# Altium PCB MAG-PCB.PcbDoc
Units mil, origin at the board's own origin, x right, y up, seen from the top; angles counter-clockwise.
Board outline 688.98 x 826.77 mil, 2 copper layers (Top Layer, Bottom Layer), stack 61.756 mil thick; 15 components, 8 nets, 51 pads, 64 vias.
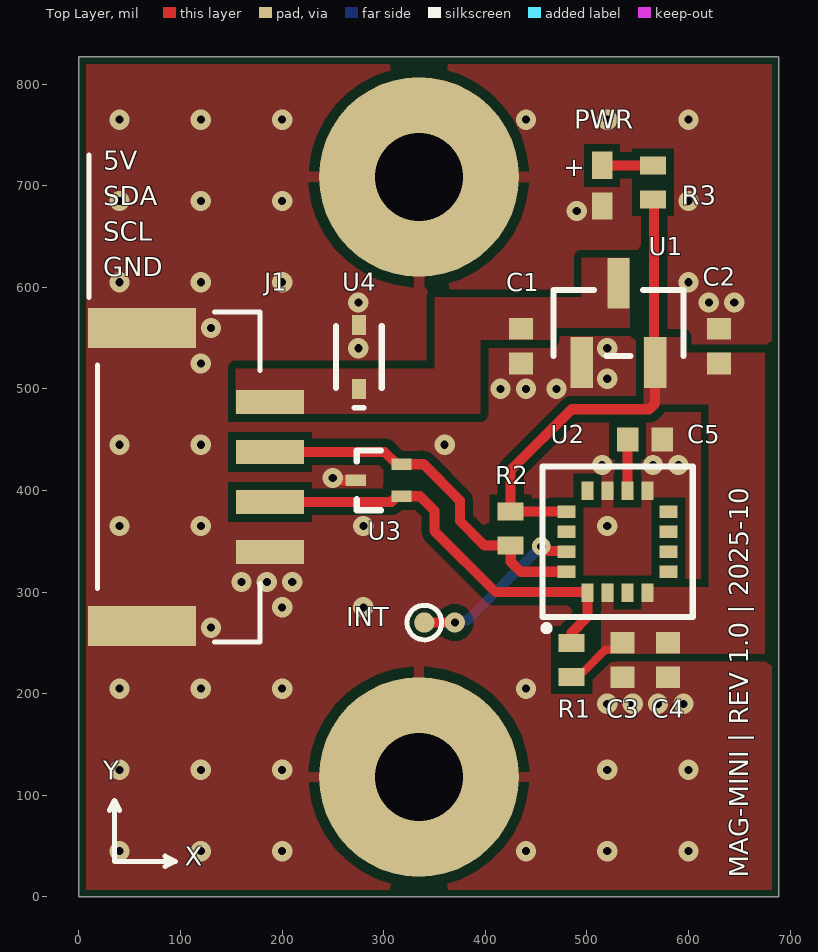
[diagram p0: Top Layer view]
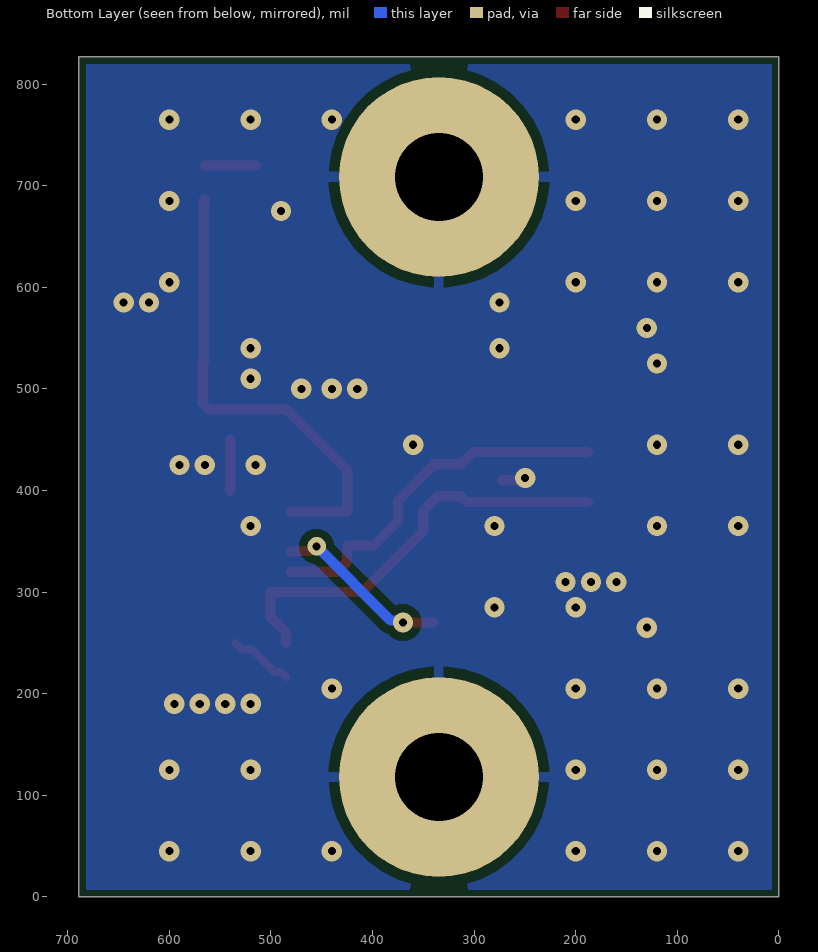
[diagram p1: Bottom Layer view, seen from below]

## Layer stack, top to bottom
Top Solder: solder mask 1, SM-001, Dk 4
Top Layer: signal copper 1.378
Dielectric 1: core 59, Core-043, Dk 4.3
Bottom Layer: signal copper 1.378
Bottom Solder: solder mask 1, SM-001, Dk 4

## Board outline
0,-0.04 0,826.73 688.98,826.73 688.98,-0.04

## Design rules (kind name [scope] priority, off if disabled: settings)
BoardOutlineClearance [All] p1: gap=7 ignorepadtopadclearanceinfootprint=FALSE
Clearance [All] p1: gap=8 ignorepadtopadclearanceinfootprint=TRUE
HoleSize [All] p1: absolutevalues=TRUE maxlimit=100 minlimit=8 maxpercent=80.000 minpercent=20.000
MinimumSolderMaskSliver [All] p1: minsoldermaskwidth=7
PolygonConnect [All] p1: connectstyle=Direct reliefconductorwidth=10 reliefentries=4 polygonreliefangle="90 Angle" airgapwidth=10
RoutingVias [All] p1: holewidth=8 width=20 viastyle="Through Hole" minholewidth=8 minwidth=16 maxholewidth=28 maxwidth=50
SilkToSilkClearance [All] p1: silktosilkclearance=8
SilkToSolderMaskClearance [IsPad] p1: minsilkscreentomaskgap=4 clearancetoexposedcopper=TRUE
SolderMaskExpansion [All] p1: expansion=4 istentingtop=FALSE
SupplyNets "Schematic Supply Nets_2" [InNet('VCC')] p1: voltage=0.000
SupplyNets "Schematic Supply Nets_1" [InNet('3V3')] p2: voltage=0.000
SupplyNets "Schematic Supply Nets" [InNet('GND')] p3: voltage=0.000
Width [All] p1: maxlimit=40 minlimit=6 preferedwidth=10
26 further rules are at their usual default settings.

## Components (designator, comment, footprint, x,y, rotation, side; value= is the part's Value field where it differs from the comment)
C1 "1uF" CAP0402 435,542.01 r90 top
C2 "1uF" CAP0402 630,542.01 r270 top
C3 "1uF" CAP0402 535,232.99 r90 top
C4 "100nF" CAP0402 580,232.99 r90 top
C5 "10uF" CAP0402 557.01,450 r180 top value=10µF
INT "INT" TEST_POINT 340,270 r90 top (schematic designator TP1)
J1 "SM04B-GHS-TB" JST_SM04B-GHS-TB(LF)(SN)- 98.43,413.35 r270 top
PWR "VLMB1500-GS08" LED_500-GS08_VIS 515,700 r90 top (schematic designator LED1)
R1 "10K" "RES 0402_1005" 485,233.27 r270 top value=10kΩ
R2 "10K" "RES 0402_1005" 424.68,362.64 r270 top value=10kΩ
R3 "100R" "RES 0402_1005" 565,703.27 r270 top value=100Ω
U1 "AP2125N-3.3TRG1" SOT-23_DIO 531.1,565 r0 top
U2 "MMC5983MA" MMC5983MA_MEM 530.16,349.57 r90 top
U3 "ESD7L5.0DT5G" SOT-723_0P85X1P25_ONS 295,410 r90 top
U4 "ESD5Z5.0T1G" SOD-523_0P9X1P3_ONS 275.59,531.46 r90 top

## Footprints (in the part's own frame and the unit in brackets; to place one, negate y for a bottom-side part, rotate by r counter-clockwise, add the part's x,y. Pads: shape width x height; smd on the part's side, far side on the other; paste and mask are expansions set on the pad)
CAP0402 [mm]
  rect 0.54x0.6 smd mask+0.051: 1(-0.432,0) 2(0.432,0)
  body extent -0.5,-0.25 0.5,0.25, height 0.55
JST_SM04B-GHS-TB(LF)(SN)- [mm]
  rect 0.6x1.7 smd: 1(-1.875,2.275) 2(-0.625,2.275) 3(0.625,2.275) 4(1.875,2.275)
  rect 1x2.7 smd: SH1(-3.725,-0.925) SH2(3.725,-0.925)
  silkscreen extent -4.13,-2.03 4.13,2.02, body extent -4.13,-2.03 4.13,2.82, height 4.35
LED_500-GS08_VIS [mil]
  rect 27x20 smd paste+0 mask+0: 1(-20,0) 2(20,0)
  body extent -20,-10 20,10, height 13
MMC5983MA_MEM [mil]
  rect 18x12 smd paste+0 mask+0: 1(-50.2,29.53) 2(-50.2,9.84) 3(-50.2,-9.84) 4(-50.2,-29.53) 9(50.2,-29.53) 10(50.2,-9.84) 11(50.2,9.84) 12(50.2,29.53)
  rect 12x18 smd paste+0 mask+0: 5(-29.53,-50.2) 6(-9.84,-50.2) 7(9.84,-50.2) 8(29.53,-50.2) 13(29.53,50.2) 14(9.84,50.2) 15(-9.84,50.2) 16(-29.53,50.2)
  silkscreen extent -86,-74 74,74, body extent -61,-61 61,61, height 39
"RES 0402_1005" [mm] "Chip Resistor, 2-Leads, Body 1.0x0.5mm, IPC Medium Density"
  rect 0.45x0.65 smd mask+0.051: 1(-0.425,0) 2(0.425,0)
  body extent -0.5,-0.25 0.5,0.25, height 0.35
SOD-523_0P9X1P3_ONS [mil]
  rect 19.87x14 smd paste+0 mask+0: 1(-31.44,0) 2(31.44,0)
  silkscreen extent -50,-23 30,23, body extent -34,-17 34,17, height 18
SOT-23_DIO [mil]
  rect 22x50 smd paste+0 mask+0: 1(-36.02,-39) 2(36.02,-39) 3(0,39)
  silkscreen extent -64,-32 64,32, body extent -59,-50 59,50, height 45
SOT-723_0P85X1P25_ONS [mil]
  rect 11x20 smd paste+0 mask+0: 1(-15.75,-22.5) 2(15.75,-22.5) 3(0,22.5)
  silkscreen extent -30,-2 30,22, body extent -24,-19 24,19, height 24
TEST_POINT [mil]
  round 20 smd mask+2: 1(0,0)
  silkscreen extent -17,-17 17,17

## Part data
C1 C2 C3: library part GRM155R61E105KA12D, "1 ÂµF Â±10% 25V Ceramic Capacitor X5R 0402 (1005 Metric)", Package="1005-2 Murata", Check_prices=https://www.snapeda.com/parts/GRM155R61E105KA12D/Murata/view-part/?ref=eda, MF=Murata, MPN=GRM155R61E105KA12D, SnapEDA_Link=https://www.snapeda.com/parts/GRM155R61E105KA12D/Murata/view-part/?ref=snap
C4: library part GRM155R61A104KA01D, "Ceramic Capacitor, Ceramic, 10V, 10% +Tol, 10% -Tol, X5R, 15% TC, 0.1uF, Surface Mount, 0402", Case Code (Imperial)=0402, Case Code (Metric)=1005, Dielectric=X5R, Dielectric Material=Ceramic, Manufacturer=Murata, Manufacturer Lifecycle Status=NRND, Max Operating Temperature=85°C, Min Operating Temperature=-55°C, Supplier Part Number=490-1318-1-ND, Tolerance=10%, Voltage=10V, Case/Package=0402, Category="Ceramic Capacitors", ComponentLink1Description=https://datasheet.octopart.com:443/GRM155R61A104KA01D-Murata-datasheet-78375005.pdf?src-supplier=Upverter, ComponentLink1URL=https://datasheet.octopart.com:443/GRM155R61A104KA01D-Murata-datasheet-78375005.pdf?src-supplier=Upverter, ComponentLink2Description=https://datasheet.octopart.com:443/GRM155R61A104KA01D-Murata-datasheet-102.pdf?src-supplier=Upverter, ComponentLink2URL=https://datasheet.octopart.com:443/GRM155R61A104KA01D-Murata-datasheet-102.pdf?src-supplier=Upverter, ComponentLink3Description=https://datasheet.octopart.com:443/GRM155R61A104KA01D-Murata-datasheet-141446445.pdf?src-supplier=Upverter, ComponentLink3URL=https://datasheet.octopart.com:443/GRM155R61A104KA01D-Murata-datasheet-141446445.pdf?src-supplier=Upverter, ComponentLink4Description=https://datasheet.octopart.com:443/GRM155R61A104KA01D-Murata-datasheet-8817987.pdf?src-supplier=element14+APAC, ComponentLink4URL=https://datasheet.octopart.com:443/GRM155R61A104KA01D-Murata-datasheet-8817987.pdf?src-supplier=element14+APAC, ComponentLink5Description=https://datasheet.octopart.com:443/GRM155R61A104KA01D-Murata-datasheet-62317102.pdf?src-supplier=element14+APAC, ComponentLink5URL=https://datasheet.octopart.com:443/GRM155R61A104KA01D-Murata-datasheet-62317102.pdf?src-supplier=element14+APAC, ComponentLink6Description=https://datasheet.octopart.com:443/GRM155R61A104KA01D-Murata-datasheet-8329115.pdf?src-supplier=_legacy+Avnet, ComponentLink6URL=https://datasheet.octopart.com:443/GRM155R61A104KA01D-Murata-datasheet-8329115.pdf?src-supplier=_legacy+Avnet, ComponentLink7Description=https://datasheet.octopart.com:443/GRM155R61A104KA01D-Murata-datasheet-141266224.pdf?src-supplier=Ciiva, ComponentLink7URL=https://datasheet.octopart.com:443/GRM155R61A104KA01D-Murata-datasheet-141266224.pdf?src-supplier=Ciiva, ComponentLink8Description=https://datasheet.octopart.com:443/GRM155R61A104KA01D-Murata-datasheet-140689730.pdf?src-supplier=Ciiva, ComponentLink8URL=https://datasheet.octopart.com:443/GRM155R61A104KA01D-Murata-datasheet-140689730.pdf?src-supplier=Ciiva, ComponentLink9Description=https://datasheet.octopart.com:443/GRM155R61A104KA01D-Murata-datasheet-138740686.pdf?src-supplier=Ciiva, ComponentLink9URL=https://datasheet.octopart.com:443/GRM155R61A104KA01D-Murata-datasheet-138740686.pdf?src-supplier=Ciiva, ComponentLink10Description=https://datasheet.octopart.com:443/GRM155R61A104KA01D-Murata-datasheet-140710158.pdf?src-supplier=TME, ComponentLink10URL=https://datasheet.octopart.com:443/GRM155R61A104KA01D-Murata-datasheet-140710158.pdf?src-supplier=TME, ComponentLink11Description=https://datasheet.octopart.com:443/GRM155R61A104KA01D-Murata-datasheet-120101189.pdf?src-supplier=Megastar, ComponentLink11URL=https://datasheet.octopart.com:443/GRM155R61A104KA01D-Murata-datasheet-120101189.pdf?src-supplier=Megastar, ComponentLink12Description=https://datasheet.octopart.com:443/GRM155R61A104KA01D-Murata-datasheet-22122223.pdf?src-supplier=Future+Electronics, ComponentLink12URL=https://datasheet.octopart.com:443/GRM155R61A104KA01D-Murata-datasheet-22122223.pdf?src-supplier=Future+Electronics, ComponentLink13Description=https://datasheet.octopart.com:443/GRM155R61A104KA01D-Murata-datasheet-14396860.pdf?src-supplier=Future+Electronics, ComponentLink13URL=https://datasheet.octopart.com:443/GRM155R61A104KA01D-Murata-datasheet-14396860.pdf?src-supplier=Future+Electronics, ComponentLink14Description=https://datasheet.octopart.com:443/GRM155R61A104KA01D-Murata-datasheet-44106124.pdf?src-supplier=Future+Electronics, ComponentLink14URL=https://datasheet.octopart.com:443/GRM155R61A104KA01D-Murata-datasheet-44106124.pdf?src-supplier=Future+Electronics, ComponentLink15Description=https://datasheet.octopart.com/GRM155R61A104KA01D-Murata-datasheet-12515295.pdf, ComponentLink15URL=https://datasheet.octopart.com/GRM155R61A104KA01D-Murata-datasheet-12515295.pdf, ComponentLink16Description=https://datasheet.octopart.com/GRM155R61A104KA01D-Murata-datasheet-12510076.pdf, ComponentLink16URL=https://datasheet.octopart.com/GRM155R61A104KA01D-Murata-datasheet-12510076.pdf, ComponentLink17Description=https://datasheet.octopart.com/GRM155R61A104KA01D-Murata-datasheet-11978611.pdf, ComponentLink17URL=https://datasheet.octopart.com/GRM155R61A104KA01D-Murata-datasheet-11978611.pdf, ComponentLink18Description=https://datasheet.octopart.com/GRM155R61A104KA01D-Murata-datasheet-10025737.pdf, ComponentLink18URL=https://datasheet.octopart.com/GRM155R61A104KA01D-Murata-datasheet-10025737.pdf, ComponentLink19Description=https://datasheet.octopart.com/GRM155R61A104KA01D-Murata-datasheet-8819587.pdf, ComponentLink19URL=https://datasheet.octopart.com/GRM155R61A104KA01D-Murata-datasheet-8819587.pdf, ComponentLink20Description=https://datasheet.octopart.com/GRM155R61A104KA01D-Murata-datasheet-14400509.pdf, ComponentLink20URL=https://datasheet.octopart.com/GRM155R61A104KA01D-Murata-datasheet-14400509.pdf, ComponentLink21Description=https://datasheet.octopart.com:443/GRM155R61A104KA01D-Murata-datasheet-12510170.pdf?src-supplier=Factory+Futures, ComponentLink21URL=https://datasheet.octopart.com:443/GRM155R61A104KA01D-Murata-datasheet-12510170.pdf?src-supplier=Factory+Futures, ComponentLink22Description=https://datasheet.octopart.com:443/GRM155R61A104KA01D-Murata-datasheet-8517407.pdf?src-supplier=Factory+Futures, ComponentLink22URL=https://datasheet.octopart.com:443/GRM155R61A104KA01D-Murata-datasheet-8517407.pdf?src-supplier=Factory+Futures, ComponentLink23Description=https://datasheet.octopart.com:443/GRM155R61A104KA01D-Murata-datasheet-8387045.pdf?src-supplier=Factory+Futures, ComponentLink23URL=https://datasheet.octopart.com:443/GRM155R61A104KA01D-Murata-datasheet-8387045.pdf?src-supplier=Factory+Futures, ComponentLink24Description=https://datasheet.octopart.com:443/GRM155R61A104KA01D-Murata-datasheet-8324201.pdf?src-supplier=Factory+Futures, ComponentLink24URL=https://datasheet.octopart.com:443/GRM155R61A104KA01D-Murata-datasheet-8324201.pdf?src-supplier=Factory+Futures, ComponentLink25Description=https://datasheet.octopart.com:443/GRM155R61A104KA01D-Murata-datasheet-7628724.pdf?src-supplier=Factory+Futures, ComponentLink25URL=https://datasheet.octopart.com:443/GRM155R61A104KA01D-Murata-datasheet-7628724.pdf?src-supplier=Factory+Futures, ComponentLink26Description=https://datasheet.octopart.com:443/GRM155R61A104KA01D-Murata-datasheet-552801.pdf?src-supplier=Factory+Futures, ComponentLink26URL=https://datasheet.octopart.com:443/GRM155R61A104KA01D-Murata-datasheet-552801.pdf?src-supplier=Factory+Futures, ComponentLink27Description=https://datasheet.octopart.com:443/GRM155R61A104KA01D-Murata-datasheet-11797706.pdf?src-supplier=Arrow+Electronics, ComponentLink27URL=https://datasheet.octopart.com:443/GRM155R61A104KA01D-Murata-datasheet-11797706.pdf?src-supplier=Arrow+Electronics, ComponentLink28Description=https://datasheet.octopart.com:443/GRM155R61A104KA01D.-Murata-datasheet-5332913.pdf?src-supplier=Farnell, ComponentLink28URL=https://datasheet.octopart.com:443/GRM155R61A104KA01D.-Murata-datasheet-5332913.pdf?src-supplier=Farnell, ComponentLink29Description=http://sigma.octopart.com:80/reach_statement/Murata-company-16.pdf?src-supplier=Compliance+Statements, ComponentLink29URL=http://sigma.octopart.com:80/reach_statement/Murata-company-16.pdf?src-supplier=Compliance+Statements, Depth=500µm, Height=500µm, Lead Free="Lead Free", Length=1mm, Lifecycle Status=NRND, Manufacturer Part Number=GRM155R61A104KA01D, Mounting Technology="Surface Mount", Number of Terminals=2, Packaging="Cut Tape", Pins=2, Pricing="1=0.1, 10=0.026, 50=0.0174, 100=0.0148, 500=0.0104, 1000=0.00907, 2500=0.00768, 5000=0.00684 (USD)", Radiation Hardening=No, REACH SVHC=Yes, RoHS=Compliant, Schedule B="8532240020, 8532240020|8532240020, 8532240020|8532240020|8532240020, 8532240020|8532240020|8532240020|8532240020", Stock=2544850, Supplier=DigiKey, Termination=SMD/SMT, Thickness=500µm, Voltage Rating=10V, Voltage Rating (DC)=10V, Width=500µm
C5: library part GRM155R61A106ME11D, "Ceramic Capacitor, Ceramic, 10V, 20% +Tol, 20% -Tol, X5R, 15% TC, 10uF, Surface Mount, 0402", Case/Package=0402, Dielectric=X5R, Dielectric Material=Ceramic, Manufacturer=Murata, Manufacturer Lifecycle Status="IN PRODUCTION", Max Operating Temperature=85°C, Min Operating Temperature=-55°C, Supplier Part Number=490-GRM155R61A106ME11DCT-ND, Tolerance=20%, Voltage Rating=10V, Category="Ceramic Capacitors", ComponentLink1Description=https://datasheet.octopart.com:443/GRM155R61A106ME11D-Murata-datasheet-155239053.pdf?src-supplier=Newark, ComponentLink1URL=https://datasheet.octopart.com:443/GRM155R61A106ME11D-Murata-datasheet-155239053.pdf?src-supplier=Newark, ComponentLink2Description=https://datasheet.octopart.com:443/GRM155R61A106ME11D-Murata-datasheet-178522865.pdf?src-supplier=Arrow.cn, ComponentLink2URL=https://datasheet.octopart.com:443/GRM155R61A106ME11D-Murata-datasheet-178522865.pdf?src-supplier=Arrow.cn, ComponentLink3Description=https://datasheet.octopart.com:443/GRM155R61A106ME11D-Murata-datasheet-165579666.pdf?src-supplier=TME, ComponentLink3URL=https://datasheet.octopart.com:443/GRM155R61A106ME11D-Murata-datasheet-165579666.pdf?src-supplier=TME, ComponentLink4Description=https://datasheet.octopart.com:443/GRM155R61A106ME11D-Murata-datasheet-141266224.pdf?src-supplier=Ciiva, ComponentLink4URL=https://datasheet.octopart.com:443/GRM155R61A106ME11D-Murata-datasheet-141266224.pdf?src-supplier=Ciiva, ComponentLink5Description=https://datasheet.octopart.com:443/GRM155R61A106ME11D-Murata-datasheet-140689744.pdf?src-supplier=Ciiva, ComponentLink5URL=https://datasheet.octopart.com:443/GRM155R61A106ME11D-Murata-datasheet-140689744.pdf?src-supplier=Ciiva, ComponentLink6Description=https://datasheet.octopart.com:443/GRM155R61A106ME11D-Murata-datasheet-138740692.pdf?src-supplier=Ciiva, ComponentLink6URL=https://datasheet.octopart.com:443/GRM155R61A106ME11D-Murata-datasheet-138740692.pdf?src-supplier=Ciiva, ComponentLink7Description=https://datasheet.octopart.com/GRM155R61A106ME11D-Murata-datasheet-12515295.pdf, ComponentLink7URL=https://datasheet.octopart.com/GRM155R61A106ME11D-Murata-datasheet-12515295.pdf, ComponentLink8Description=https://datasheet.octopart.com/GRM155R61A106ME11D-Murata-datasheet-12510076.pdf, ComponentLink8URL=https://datasheet.octopart.com/GRM155R61A106ME11D-Murata-datasheet-12510076.pdf, ComponentLink9Description=https://datasheet.octopart.com/GRM155R61A106ME11D-Murata-datasheet-11978611.pdf, ComponentLink9URL=https://datasheet.octopart.com/GRM155R61A106ME11D-Murata-datasheet-11978611.pdf, ComponentLink10Description=https://datasheet.octopart.com/GRM155R61A106ME11D-Murata-datasheet-10025737.pdf, ComponentLink10URL=https://datasheet.octopart.com/GRM155R61A106ME11D-Murata-datasheet-10025737.pdf, ComponentLink11Description=https://datasheet.octopart.com/GRM155R61A106ME11D-Murata-datasheet-8819587.pdf, ComponentLink11URL=https://datasheet.octopart.com/GRM155R61A106ME11D-Murata-datasheet-8819587.pdf, ComponentLink12Description=http://sigma.octopart.com:80/reach_statement/Murata-company-16.pdf?src-supplier=Compliance+Statements, ComponentLink12URL=http://sigma.octopart.com:80/reach_statement/Murata-company-16.pdf?src-supplier=Compliance+Statements, Height=500µm, Length=1mm, Lifecycle Status=Production, Manufacturer Part Number=GRM155R61A106ME11D, Material=Ceramic, Mounting Technology="Surface Mount", Number of Terminals=2, Pricing="1=0.08, 10=0.014 (USD)", REACH SVHC=Yes, RoHS=Compliant, Stock=1513396, Supplier=DigiKey, Thickness=500µm, Voltage Rating (DC)=10V, Width=500µm
INT: library part TEST_POINT
J1: library part SM04B-GHS-TB(LF)(SN)-, "Connector Header Surface Mount, Right Angle 4 position 0.049 (1.25mm)", MPN=SM04B-GHS-TB(LF)(SN), Package=None, Check_prices=https://www.snapeda.com/parts/SM04B-GHS-TB(LF)(SN)/JST/view-part/?ref=eda, MF="JST Sales America Inc.", SnapEDA_Link=https://www.snapeda.com/parts/SM04B-GHS-TB(LF)(SN)/JST/view-part/?ref=snap
PWR: "CHIPLED(0402) BLUE ULTRABRIGHT -e4", Manufacturer_Name=Vishay, Copyright="Copyright (C) 2025 Ultra Librarian. All rights reserved.", MPN=VLMB1500-GS08
R1 R2: library part RC0402JR-0710KL, "Res Thick Film 0402 10K Ohm 5% 0.063W(1/16W) ±100ppm/C Pad SMD T/R", Case Code (Imperial)=0402, Manufacturer="Yageo Group", Max Operating Temperature=155°C, Max Power Dissipation=63mW, Min Operating Temperature=-55°C, Power Dissipation=62.5mW, Supplier Part Number=311-10KJRTR-ND, Temperature Coefficient=100ppm/°C, Tolerance=5%, Voltage Rating=50V, Case/Package=0402, Category="Chip SMD Resistors", China RoHS=Non-Compliant, ComponentLink1Description=https://datasheet.octopart.com:443/RC0402JR-0710KL-Yageo-datasheet-175887523.pdf?src-supplier=IHS, ComponentLink1URL=https://datasheet.octopart.com:443/RC0402JR-0710KL-Yageo-datasheet-175887523.pdf?src-supplier=IHS, ComponentLink2Description=https://datasheet.octopart.com:443/RC0402JR-0710KL-Yageo-datasheet-10408619.pdf?src-supplier=Newark, ComponentLink2URL=https://datasheet.octopart.com:443/RC0402JR-0710KL-Yageo-datasheet-10408619.pdf?src-supplier=Newark, ComponentLink3Description=https://datasheet.octopart.com:443/RC0402JR-0710KL-Yageo-datasheet-505231.pdf?src-supplier=Newark, ComponentLink3URL=https://datasheet.octopart.com:443/RC0402JR-0710KL-Yageo-datasheet-505231.pdf?src-supplier=Newark, ComponentLink4Description=https://datasheet.octopart.com:443/RC0402JR-0710KL-Yageo-Group-datasheet-176638170.pdf?src-supplier=Newark, ComponentLink4URL=https://datasheet.octopart.com:443/RC0402JR-0710KL-Yageo-Group-datasheet-176638170.pdf?src-supplier=Newark, ComponentLink5Description=https://datasheet.octopart.com:443/RC0402JR-0710KL-Yageo-datasheet-141265859.pdf?src-supplier=Upverter, ComponentLink5URL=https://datasheet.octopart.com:443/RC0402JR-0710KL-Yageo-datasheet-141265859.pdf?src-supplier=Upverter, ComponentLink6Description=https://sigma.octopart.com:443/138820526/technical_drawing/Yageo-RC0402JR-0710KL.pdf?src-supplier=Upverter, ComponentLink6URL=https://sigma.octopart.com:443/138820526/technical_drawing/Yageo-RC0402JR-0710KL.pdf?src-supplier=Upverter, ComponentLink7Description=https://datasheet.octopart.com:443/RC0402JR-0710KL-Yageo-datasheet-62067350.pdf?src-supplier=Farnell, ComponentLink7URL=https://datasheet.octopart.com:443/RC0402JR-0710KL-Yageo-datasheet-62067350.pdf?src-supplier=Farnell, ComponentLink8Description=https://datasheet.octopart.com:443/RC0402JR-0710KL-Yageo-datasheet-12531192.pdf?src-supplier=Seeed+Studio, ComponentLink8URL=https://datasheet.octopart.com:443/RC0402JR-0710KL-Yageo-datasheet-12531192.pdf?src-supplier=Seeed+Studio, ComponentLink9Description=https://datasheet.octopart.com:443/RC0402JR-0710KL-Yageo-datasheet-8324527.pdf?src-supplier=TME, ComponentLink9URL=https://datasheet.octopart.com:443/RC0402JR-0710KL-Yageo-datasheet-8324527.pdf?src-supplier=TME, ComponentLink10Description=https://datasheet.octopart.com:443/RC0402JR-0710KL-Yageo-datasheet-164759695.pdf?src-supplier=Future+Electronics, ComponentLink10URL=https://datasheet.octopart.com:443/RC0402JR-0710KL-Yageo-datasheet-164759695.pdf?src-supplier=Future+Electronics, ComponentLink11Description=https://datasheet.octopart.com:443/RC0402JR-0710KL-Yageo-datasheet-137700087.pdf?src-supplier=Future+Electronics, ComponentLink11URL=https://datasheet.octopart.com:443/RC0402JR-0710KL-Yageo-datasheet-137700087.pdf?src-supplier=Future+Electronics, ComponentLink12Description=https://datasheet.octopart.com/RC0402JR-0710KL-Yageo-datasheet-73766026.pdf, ComponentLink12URL=https://datasheet.octopart.com/RC0402JR-0710KL-Yageo-datasheet-73766026.pdf, ComponentLink13Description=https://datasheet.octopart.com:443/RC0402JR-0710KL-Yageo-datasheet-8329306.pdf?src-supplier=element14, ComponentLink13URL=https://datasheet.octopart.com:443/RC0402JR-0710KL-Yageo-datasheet-8329306.pdf?src-supplier=element14, ComponentLink14Description=http://sigma.octopart.com:80/rohs_statement/Yageo-company-2.pdf?src-supplier=Compliance+Statements, ComponentLink14URL=http://sigma.octopart.com:80/rohs_statement/Yageo-company-2.pdf?src-supplier=Compliance+Statements, ComponentLink15Description=http://sigma.octopart.com:80/conflict_mineral_statement/Yageo-company-3.pdf?src-supplier=Compliance+Statements, ComponentLink15URL=http://sigma.octopart.com:80/conflict_mineral_statement/Yageo-company-3.pdf?src-supplier=Compliance+Statements, Composition="Thick Film", Depth=500µm, Features="Moisture Resistant", Height=350µm, Lead Free="Lead Free", Length=1mm, Lifecycle Status=Production, Manufacturer Part Number=RC0402JR-0710KL, Military Standard=Not, Mounting Technology="Surface Mount", Number of Terminals=2, Number of Terminations=2, Packaging="Tape & Reel", Pins=2, Power Rating=62.5mW, Pricing="10000=0.00204, 20000=0.0017, 30000=0.00166, 50000=0.00153, 70000=0.00152 (USD)", REACH SVHC=Yes, RoHS=Compliant, Schedule B="8533210045, 8533210045|8533210045, 8533210045|8533210045|8533210045, 8533210045|8533210045|8533210045|8533210045", Stock=11091527, Supplier=DigiKey, Termination=SMD/SMT, Voltage Rating (AC)=50V, Voltage Rating (DC)=50V, Width=500µm, Working Voltage=50V
R3: library part CRCW0402100RFKEDHP, "Res Thick Film 0402 100 Ohm 1% 0.2W ±100ppm/°C Molded SMD SMD Paper T/R", Case Code (Imperial)=0402, Case Code (Metric)=1005, Manufacturer=Vishay, Manufacturer Package Identifier=CRCW0402-HPe3, Max Operating Temperature=155°C, Min Operating Temperature=-55°C, Power Dissipation=200mW, Supplier Part Number=541-100YCT-ND, Temperature Coefficient=100ppm/°C, Tolerance=1%, Voltage Rating=50V, Case/Package=0402, Category="Chip SMD Resistors", China RoHS=Non-Compliant, ComponentLink1Description=https://datasheet.octopart.com/CRCW0402100RFKEDHP-Vishay-datasheet-83567917.pdf, ComponentLink1URL=https://datasheet.octopart.com/CRCW0402100RFKEDHP-Vishay-datasheet-83567917.pdf, ComponentLink2Description=https://datasheet.octopart.com/D-CRCW-e3-Standard-Thick-Film-Chip-Resistors-Vishay-datasheet-family-64.pdf, ComponentLink2URL=https://datasheet.octopart.com/D-CRCW-e3-Standard-Thick-Film-Chip-Resistors-Vishay-datasheet-family-64.pdf, ComponentLink3Description=https://datasheet.octopart.com:443/CRCW0402100RFKEDHP-Vishay-datasheet-87136057.pdf?src-supplier=element14+APAC, ComponentLink3URL=https://datasheet.octopart.com:443/CRCW0402100RFKEDHP-Vishay-datasheet-87136057.pdf?src-supplier=element14+APAC, ComponentLink4Description=https://datasheet.octopart.com:443/CRCW0402100RFKEDHP-Vishay-datasheet-78776210.pdf?src-supplier=element14+APAC, ComponentLink4URL=https://datasheet.octopart.com:443/CRCW0402100RFKEDHP-Vishay-datasheet-78776210.pdf?src-supplier=element14+APAC, ComponentLink5Description=https://datasheet.octopart.com:443/CRCW0402100RFKEDHP-Vishay-datasheet-62317933.pdf?src-supplier=element14+APAC, ComponentLink5URL=https://datasheet.octopart.com:443/CRCW0402100RFKEDHP-Vishay-datasheet-62317933.pdf?src-supplier=element14+APAC, ComponentLink6Description=https://datasheet.octopart.com:443/CRCW0402100RFKEDHP-Vishay-datasheet-37143532.pdf?src-supplier=element14+APAC, ComponentLink6URL=https://datasheet.octopart.com:443/CRCW0402100RFKEDHP-Vishay-datasheet-37143532.pdf?src-supplier=element14+APAC, ComponentLink7Description=https://datasheet.octopart.com:443/CRCW0402100RFKEDHP-Vishay-datasheet-66581887.pdf?src-supplier=element14+APAC, ComponentLink7URL=https://datasheet.octopart.com:443/CRCW0402100RFKEDHP-Vishay-datasheet-66581887.pdf?src-supplier=element14+APAC, ComponentLink8Description=https://datasheet.octopart.com:443/CRCW0402100RFKEDHP-Vishay-datasheet-13148866.pdf?src-supplier=_legacy+Avnet, ComponentLink8URL=https://datasheet.octopart.com:443/CRCW0402100RFKEDHP-Vishay-datasheet-13148866.pdf?src-supplier=_legacy+Avnet, ComponentLink9Description=https://datasheet.octopart.com:443/CRCW0402100RFKEDHP-Vishay-datasheet-13131392.pdf?src-supplier=_legacy+Avnet, ComponentLink9URL=https://datasheet.octopart.com:443/CRCW0402100RFKEDHP-Vishay-datasheet-13131392.pdf?src-supplier=_legacy+Avnet, ComponentLink10Description=https://datasheet.octopart.com:443/CRCW0402100RFKEDHP-Vishay-datasheet-12593106.pdf?src-supplier=_legacy+Avnet, ComponentLink10URL=https://datasheet.octopart.com:443/CRCW0402100RFKEDHP-Vishay-datasheet-12593106.pdf?src-supplier=_legacy+Avnet, ComponentLink11Description=https://datasheet.octopart.com:443/CRCW0402100RFKEDHP-Vishay-datasheet-12544674.pdf?src-supplier=_legacy+Avnet, ComponentLink11URL=https://datasheet.octopart.com:443/CRCW0402100RFKEDHP-Vishay-datasheet-12544674.pdf?src-supplier=_legacy+Avnet, ComponentLink12Description=https://datasheet.octopart.com:443/CRCW0402100RFKEDHP-Vishay-datasheet-12531795.pdf?src-supplier=_legacy+Avnet, ComponentLink12URL=https://datasheet.octopart.com:443/CRCW0402100RFKEDHP-Vishay-datasheet-12531795.pdf?src-supplier=_legacy+Avnet, ComponentLink13Description=https://datasheet.octopart.com:443/CRCW0402100RFKEDHP-Vishay-datasheet-12518686.pdf?src-supplier=_legacy+Avnet, ComponentLink13URL=https://datasheet.octopart.com:443/CRCW0402100RFKEDHP-Vishay-datasheet-12518686.pdf?src-supplier=_legacy+Avnet, ComponentLink14Description=https://datasheet.octopart.com:443/CRCW0402100RFKEDHP-Vishay-datasheet-12509906.pdf?src-supplier=_legacy+Avnet, ComponentLink14URL=https://datasheet.octopart.com:443/CRCW0402100RFKEDHP-Vishay-datasheet-12509906.pdf?src-supplier=_legacy+Avnet, ComponentLink15Description=https://datasheet.octopart.com:443/CRCW0402100RFKEDHP-Vishay-datasheet-10669844.pdf?src-supplier=_legacy+Avnet, ComponentLink15URL=https://datasheet.octopart.com:443/CRCW0402100RFKEDHP-Vishay-datasheet-10669844.pdf?src-supplier=_legacy+Avnet, ComponentLink16Description=https://datasheet.octopart.com:443/CRCW0402100RFKEDHP-Vishay-datasheet-8703221.pdf?src-supplier=_legacy+Avnet, ComponentLink16URL=https://datasheet.octopart.com:443/CRCW0402100RFKEDHP-Vishay-datasheet-8703221.pdf?src-supplier=_legacy+Avnet, ComponentLink17Description=https://datasheet.octopart.com:443/CRCW0402100RFKEDHP-Vishay-datasheet-62316122.pdf?src-supplier=Future+Electronics, ComponentLink17URL=https://datasheet.octopart.com:443/CRCW0402100RFKEDHP-Vishay-datasheet-62316122.pdf?src-supplier=Future+Electronics, ComponentLink18Description=https://datasheet.octopart.com:443/CRCW0402100RFKEDHP-Vishay-Dale-datasheet-47688881.pdf?src-supplier=RS+(Formerly+Allied+Electronics), ComponentLink18URL=https://datasheet.octopart.com:443/CRCW0402100RFKEDHP-Vishay-Dale-datasheet-47688881.pdf?src-supplier=RS+(Formerly+Allied+Electronics), ComponentLink19Description=https://datasheet.octopart.com:443/CRCW0402100RFKEDHP-Vishay-datasheet-8359436.pdf?src-supplier=Newark, ComponentLink19URL=https://datasheet.octopart.com:443/CRCW0402100RFKEDHP-Vishay-datasheet-8359436.pdf?src-supplier=Newark, ComponentLink20Description=http://sigma.octopart.com:80/rohs_certificate/D-CRCW-e3-Standard-Thick-Film-Chip-Resistors-Vishay-family-102.pdf?src-supplier=Compliance+Statements, ComponentLink20URL=http://sigma.octopart.com:80/rohs_certificate/D-CRCW-e3-Standard-Thick-Film-Chip-Resistors-Vishay-family-102.pdf?src-supplier=Compliance+Statements, Composition="Thick Film", Contact Plating=Tin, Depth=500µm, Height=300µm, Lead Free="Lead Free", Length=1mm, Lifecycle Status=Production, Manufacturer Part Number=CRCW0402100RFKEDHP, Mounting Technology="Surface Mount", Number of Terminals=2, Packaging="Cut Tape", Power Rating=200mW, Pricing="1=0.11, 10=0.054, 25=0.0412, 50=0.034, 100=0.0286, 250=0.02312, 500=0.02002, 1000=0.01755, 5000=0.01363 (USD)", Radiation Hardening=No, REACH SVHC=Yes, RoHS=Compliant, Schedule B="8533210045, 8533210045|8533210045|8533210045|8533210045|8533210045|8533210045|8533210045, 8533210045|8533210045|8533210045|8533210045|8533210045|8533210045|8533210045|8533210045, 8533210045|8533210045|8533210045|8533210045|8533210045|8533210045|8533210045|8533210045|8533210045", Stock=503629, Supplier=DigiKey, Termination=SMD/SMT, Voltage Rating (DC)=50V, Weight=652.039032µg, Width=500µm, Working Voltage=50V
U1: "IC REG LINEAR 3.3V 300MA SOT23-3", Manufacturer_Name="Diodes Inc", Copyright="Copyright (C) 2025 Ultra Librarian. All rights reserved.", Manufacturer_Part_Number=AP2125N-3.3TRG1, RefDes=RefDes, Type="Power Management"
U2: "3-AXIS MAGNETIC SENSOR", Manufacturer_Name=Memsic, Copyright="Copyright (C) 2025 Ultra Librarian. All rights reserved.", Manufacturer_Part_Number=MMC5983MA, RefDes=RefDes, Type=Type
U3: "TVS DIODE 5VWM 10.4VC SOT723", Manufacturer_Name=onsemi, Copyright="Copyright (C) 2025 Ultra Librarian. All rights reserved.", Manufacturer_Part_Number=ESD7L5.0DT5G, RefDes=RefDes, Type=Type
U4: "TVS DIODE 5VWM 18.6VC SOD523", Manufacturer_Name=onsemi, Copyright="Copyright (C) 2025 Ultra Librarian. All rights reserved.", Manufacturer_Part_Number=ESD5Z5.0T1G, RefDes=RefDes, Type=Type

## Free pads (board coordinates)
  round 196.85 hole 86.61: 1(334.65,708.62) 2(334.65,118.07)

## Via types
v1: diameter 20, hole 8, Top Layer to Bottom Layer, tented both sides, 63 vias
v2: diameter 18, hole 8, Top Layer to Bottom Layer, tented both sides, 1 vias

## Nets (pads, with @x,y where several pads share a name; then routed paths per layer and width w, separated by ;. In a path a pad name is that pad's centre, name@x,y a point inside that pad or via, vN(x,y) a via of type N, cw(c..) or ccw(c..) an arc to the next point about the centre after c; other vN are vias at no path point)
3V3: C2.2 C3.2 C4.2 R1.2 R2.1 R3.2 U1.2 U2.2 U2.4 U2.13 | length 531.3
  Top Layer w8: U2.13 U2.13@480.29,378.76 ; R1.2 489.86,221.39 496.39,221.39 518.37,243.37 528.37,243.37 C3.2
  Top Layer w10: U2.13 479.82,379.23 424.82,379.23 424.82,419.82 485,480 561.27,480 567.13,485.86 U1.2 566.06,527.06 566.06,685.47 R3.2
GND: C1.1 C2.1 C3.1 C4.1 C5.1 J1.4 J1.SH1 J1.SH2 pad.1 pad.2 PWR.1 U1.1 U2.9 U2.11 U3.3 U4.2 | length 25
  Top Layer w10: v1(249.8,412.26) 249.8,410 U3.3
  other v1: 40,45 120,45 200,45 440,45 520,45 600,45 40,125 120,125 200,125 520,125 600,125 520,190 545,190 570,190 595,190 40,205 120,205 200,205 440,205 130,265 200,285 280,285 160,310 185,310 210,310 40,365 120,365 280,365 520,365 515,425 565,425 590,425 40,445 120,445 360,445 415,500 440,500 470,500 520,510 120,525 275,540 520,540 130,560 275,585 620,585 645,585 40,605 120,605 200,605 600,605 490,675 40,685 120,685 200,685 600,685 40,765 120,765 200,765 440,765 520,765 600,765
NetC5_2: C5.2 U2.10 | length 50.2
  Top Layer w10: U2.10 C5.2
NetLED1_2: PWR.2 R3.1 | length 50
  Top Layer w10: PWR.2 R3.1
NetTP1_1: INT.1 U2.15 | length 173.3
  Top Layer w10: INT.1 v1(370,270) ; v2(455,345) 457.16,345 461.76,340.41 479.28,340.41 U2.15 U2.15@480.03,339.79
  Bottom Layer w10: v1(370,270) 371.91,271.91 381.91,271.91 v2(455,345)
SCL: J1.3 R1.1 U2.1 U3.1 | length 421.8
  Top Layer w10: J1.3 307.49,388.74 313,394.25 335.75,394.25 350,380 350,360 410,300 500,300 U2.1 500.63,275.63 485,260 R1.1
SDA: J1.2 R2.2 U2.16 U3.2 | length 361.7
  Top Layer w10: J1.2 300.8,437.95 313,425.75 339.25,425.75 375,390 375,370 399.09,345.91 R2.2 425,345.59 425,330 435,320 440,320 440.04,320.04 U2.16
VCC: C1.2 J1.1 U1.3 U4.1
pads on no net: U2.3 U2.5 U2.6 U2.7 U2.8 U2.12 U2.14

## Polygon pours and split planes (outlines as drawn)
GND on Top Layer "GND_L01_P003" (solid, pour order 3): 0,826.73 688.98,826.73 688.98,-0.04 0,-0.04
3V3 on Top Layer "3V3_L01_P001" (solid, pour order 1): 556.13,551 556.13,485 620,485 620,305 553.68,305 553.68,285 526.31,285 526.31,308.37 514.31,308.37 514.31,239.37 675,239.37 675,535.63 595,535.63 595,551
VCC on Top Layer "VCC_L01_P000" (solid, pour order 0): 154.53,475.35 154.53,520 350,520 350,590 495,590 495,629 542.1,629 542.1,560 465,560 465,548.39 395,548.39 395,475.35
GND on Bottom Layer "GND_L02_P002" (solid, pour order 2): 0,826.73 688.98,826.73 688.98,-0.04 0,-0.04

## Silkscreen, mask and mechanical layers (free items; w line width, h text height)
Top Overlay:
  lines w5: 10,590 10,730 ; 30,85 35,95 ; 40,85 35,95 ; 85,30 95,35 ; 85,40 95,35 ; 35,95 35,35 95,35
  text "5V" at 24,709.38 h32
  text "SDA" at 24,674.38 h32
  text "SCL" at 24,639.38 h32
  text "GND" at 24,604.38 h32
  text "Y" at 23.97,109 h32
  text "X" at 104,24 h32
  text "MAG-MINI | REV 1.0 | 2025-10" at 664.96,19 h32 r90
Mechanical 1:
  the board outline again, w5

## Text inside footprints (layer, text, board x,y; h text height)
PWR: Top Overlay "+" at 501.96,728 h32 r90